# Altium PCB Edge_Board.PcbDoc
Units mm, origin at the board's own origin, x right, y up, seen from the top; angles counter-clockwise.
Board outline 209.16 x 10 mm, 2 copper layers (Top Layer, Bottom Layer); 6 components, 0 nets, 6 pads, 0 vias.
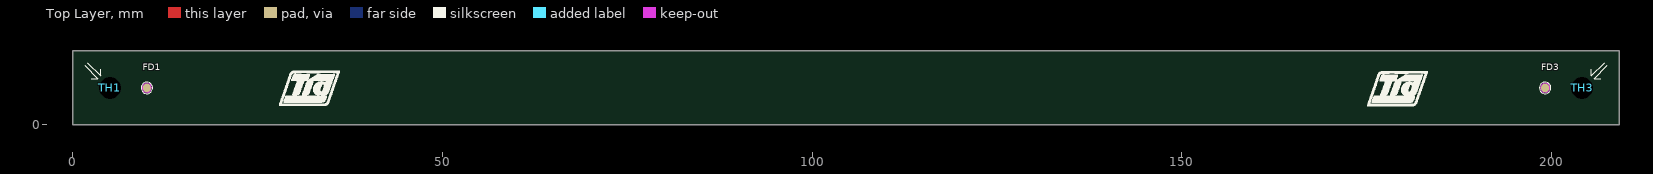
[diagram p0: Top Layer view]
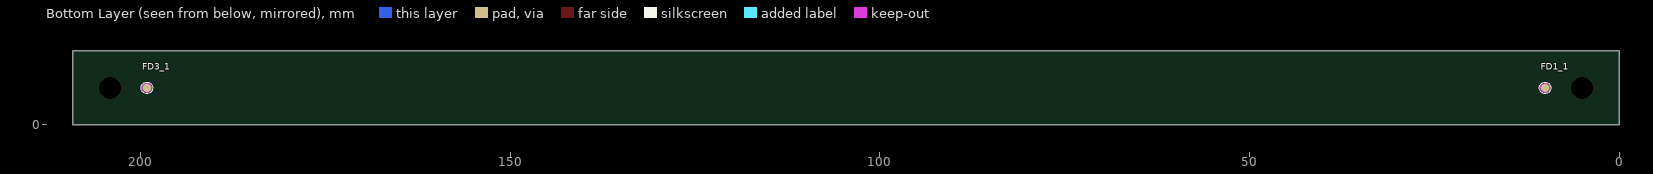
[diagram p1: Bottom Layer view, seen from below]

## Layer stack, top to bottom
Top Solder: solder mask 0.0102, Solder Resist, Dk 3.5
Top Layer: signal copper 0.0356
Dielectric 1: dielectric 0.32, FR-4, Dk 4.8
Bottom Layer: signal copper 0.0356
Bottom Solder: solder mask 0.0102, Solder Resist, Dk 3.5

## Board outline
0,0 209.16,0 209.16,10 0,10

## Design rules (kind name [scope] priority, off if disabled: settings)
Clearance [All] p1: gap=0.254 ignorepadtopadclearanceinfootprint=FALSE except(0: Arc-Hole Track-Hole SMDPad-Hole THPad-Hole Via-Hole Fill-Hole Poly-Hole Region-Hole Text-Hole)
HoleSize [All] p1: absolutevalues=TRUE maxlimit=30 minlimit=0.025 maxpercent=80.000 minpercent=20.000
PolygonConnect [All] p1: connectstyle=Relief reliefconductorwidth=0.254 reliefentries=4 polygonreliefangle="90 Angle" airgapwidth=0.254
RoutingVias [All] p1: holewidth=0.711 width=1.27 viastyle="Through Hole" minholewidth=0.711 minwidth=1.27 maxholewidth=0.711 maxwidth=1.27
SolderMaskExpansion [All] p1: expansion=0.102 istentingtop=FALSE
Width [All] p1: maxlimit=0.254 minlimit=0.254 preferedwidth=0.254
29 further rules are at their usual default settings.

## Components (designator, comment, footprint, x,y, rotation, side; value= is the part's Value field where it differs from the comment)
FD1 "Comment" FD_1.20MM 10,5 r0 top
FD1_1 "Comment" FD_1.20mm 10,5 r0 bottom
FD3 "Comment" FD_1.20MM 199.16,5 r0 top
FD3_1 "Comment" FD_1.20mm 199.16,5 r0 bottom
TH1 "Comment" TH_3mm 5,5 r135 top
TH3 "Comment" TH_3mm 204.16,5 r45 top

## Footprints (in the part's own frame and the unit in brackets; to place one, negate y for a bottom-side part, rotate by r counter-clockwise, add the part's x,y. Pads: shape width x height; smd on the part's side, far side on the other; paste and mask are expansions set on the pad)
FD_1.20MM [mm] "1.20 mm Fiducial"
  round 1.2 smd paste+0 mask+0.102: 0(0,0)
  Keep-Out Layer circle w0.127: c0,0 r0.635
  silkscreen extent -0.78,-0.79 0.79,0.79
FD_1.20mm [mm] "1.20 mm Fiducial"
  round 1.2 smd paste+0 mask+0.102: 0(0,0)
  Keep-Out Layer circle w0.127: c0,0 r0.635
  silkscreen extent -0.78,-0.79 0.79,0.79
TH_3mm [mm] "3 mm Tooling Hole"
  round 0 hole 3 unplated paste+0: ""(0,0)
  silkscreen extent 2.03,-0.89 4.57,0.89

## Nets (pads, with @x,y where several pads share a name; then routed paths per layer and width w, separated by ;. In a path a pad name is that pad's centre, name@x,y a point inside that pad or via, vN(x,y) a via of type N, cw(c..) or ccw(c..) an arc to the next point about the centre after c; other vN are vias at no path point)
pads on no net: FD1.0 FD1_1.0 FD3.0 FD3_1.0 TH1. TH3.

## Keep-outs
Keep-Out Layer:
  text "KEEP OUT" at 43.2,1.75 h10.16
  text "KEEP OUT" at 126.52,1.75 h10.16

## Silkscreen, mask and mechanical layers (free items; w line width, h text height)
Top Overlay:
  drawing of 924 lines, arcs and shapes, not listed
Mechanical 1:
  the board outline again, w0.025
Mechanical 26:
  lines w0.254: 290,5 290.022,5